# Altium PCB PCB1.PcbDoc
Units mil, origin at the board's own origin, x right, y up, seen from the top; angles counter-clockwise.
Board outline 2283.46 x 3700.79 mil, 2 copper layers (Top Layer, Bottom Layer); 44 components, 39 nets, 211 pads, 27 vias.
Unrouted connection lines stored in the file: 70.
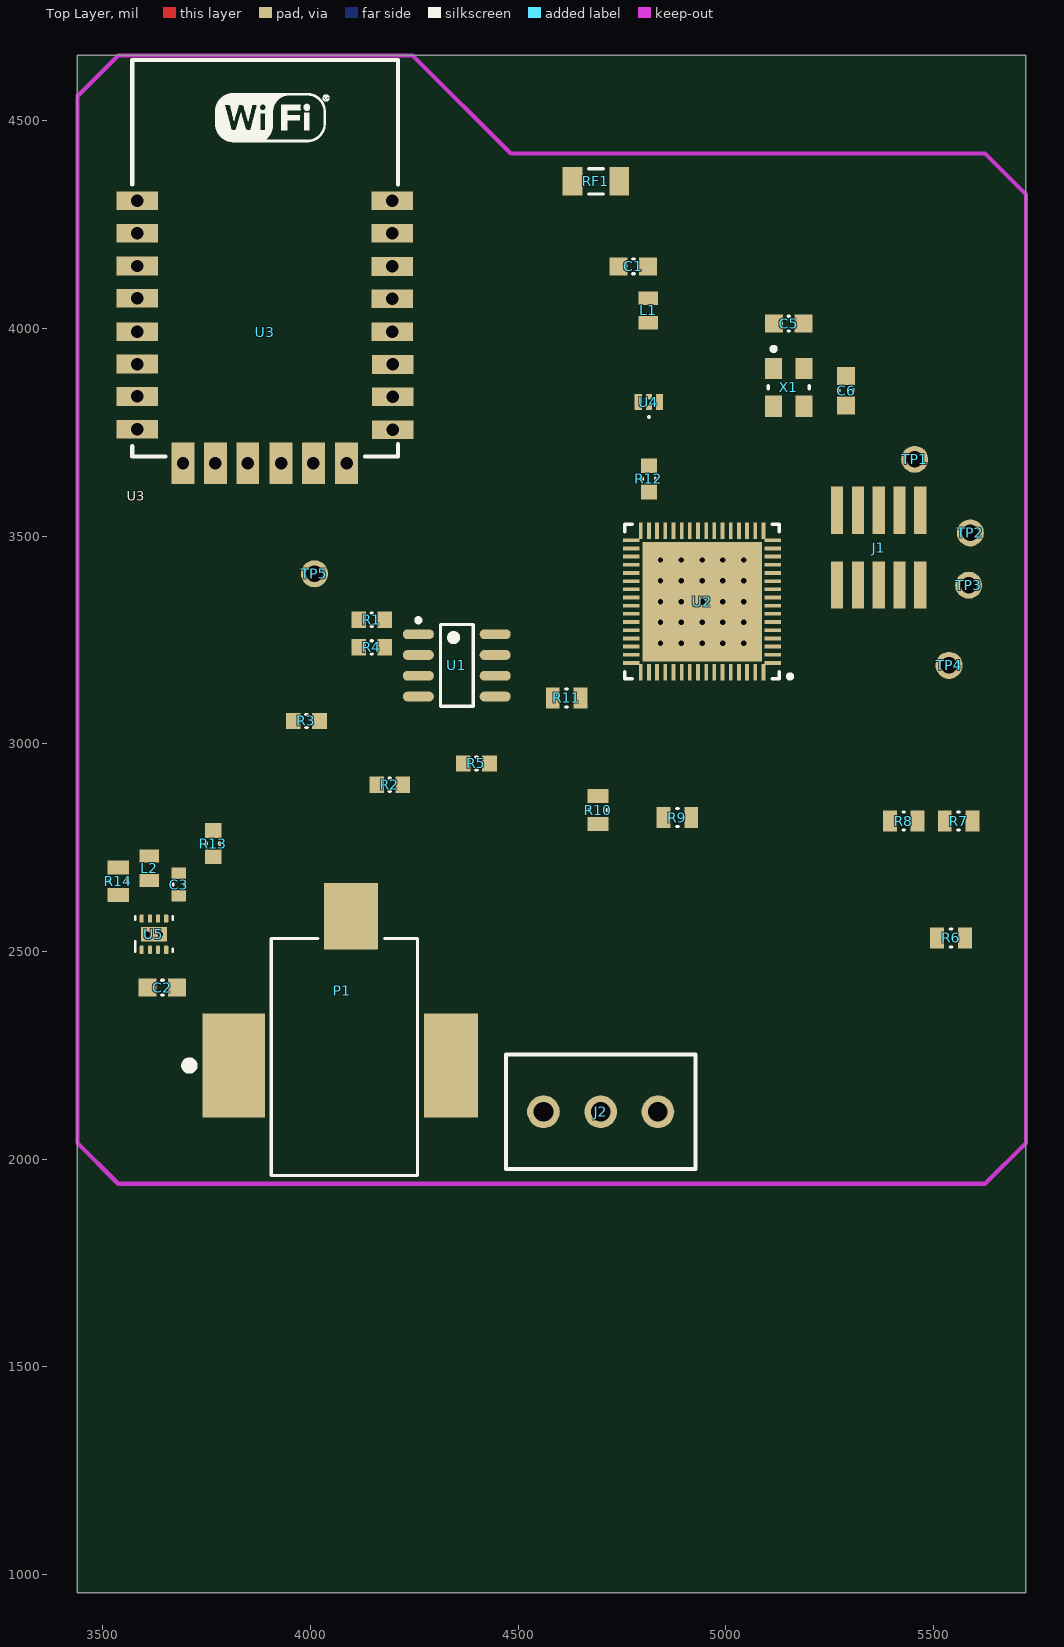
[diagram p0: Top Layer view]
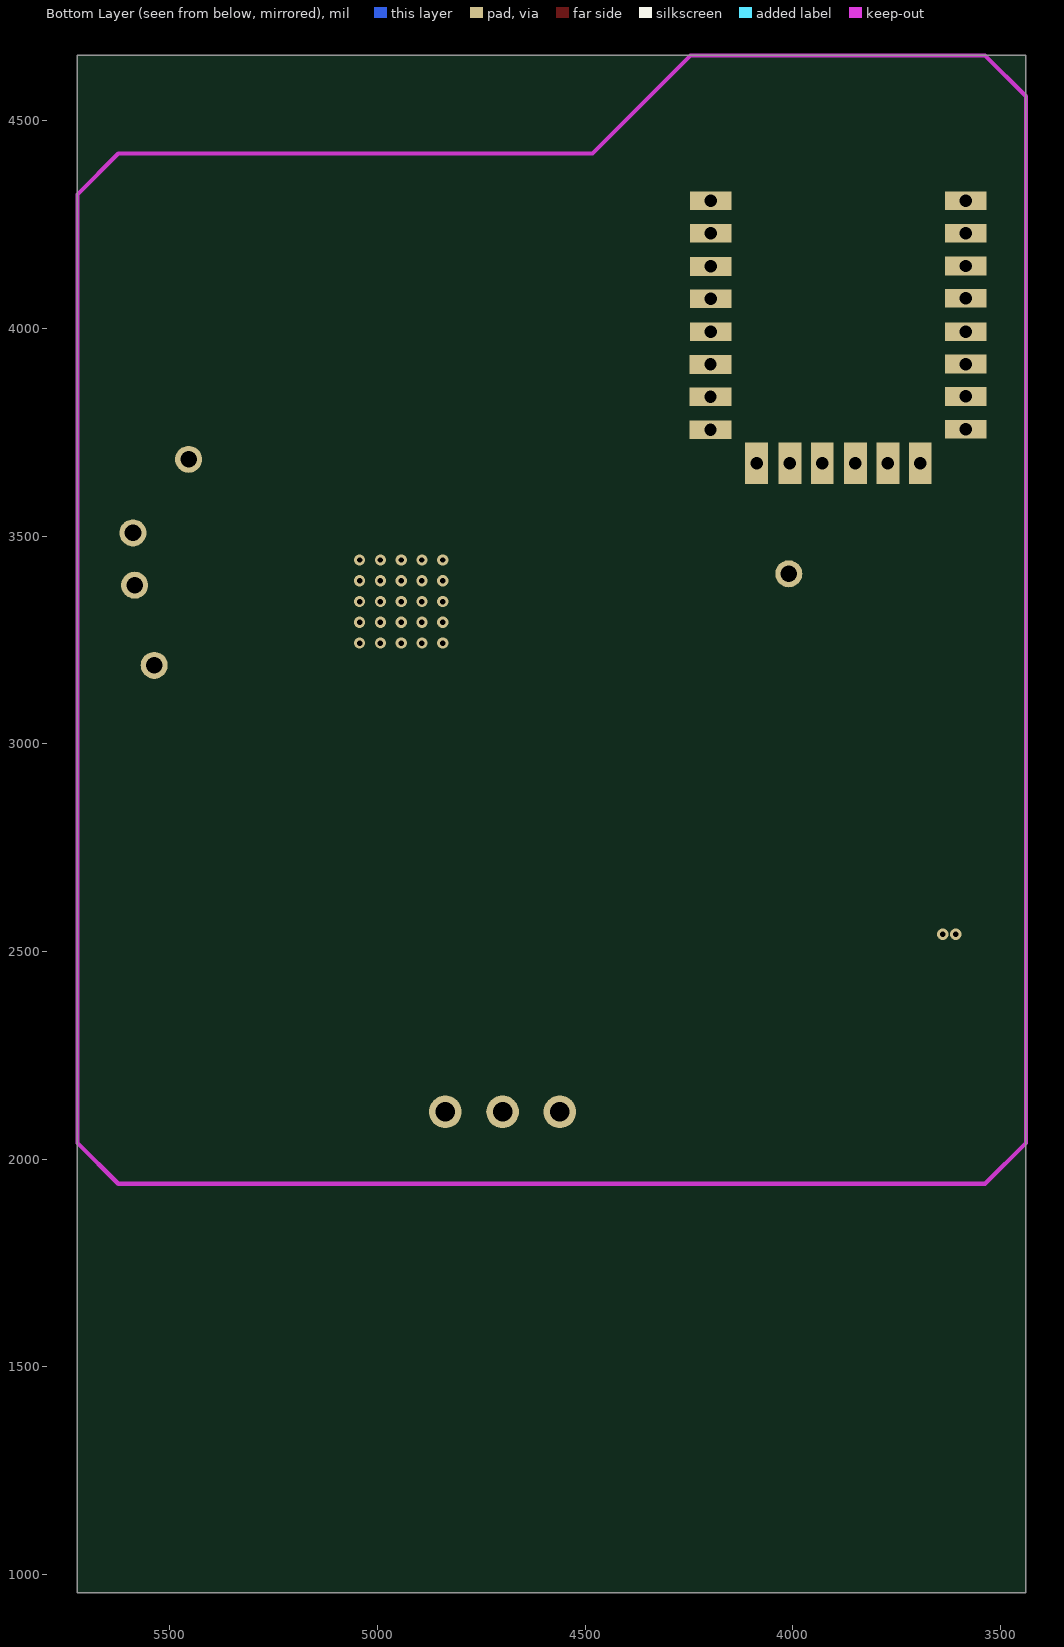
[diagram p1: Bottom Layer view, seen from below]

## Layer stack, top to bottom
Top Solder: solder mask 0.4, Solder Resist, Dk 3.5
Top Layer: signal copper 1.4
Dielectric 1: dielectric 12.6, FR-4, Dk 4.8
Bottom Layer: signal copper 1.4
Bottom Solder: solder mask 0.4, Solder Resist, Dk 3.5

## Board outline
3439.12,956.69 5722.58,956.69 5722.58,4657.48 3439.12,4657.48 3439.12,996.06

## Design rules (kind name [scope] priority, off if disabled: settings)
Clearance [All] p1: gap=6
HoleSize [All] p1: absolutevalues=TRUE maxlimit=100 minlimit=13 maxpercent=80.000 minpercent=20.000
PolygonConnect [All] p1: connectstyle=Relief reliefconductorwidth=10 reliefentries=4 polygonreliefangle="90 Angle" airgapwidth=10
RoutingTopology [All] p1: topology=Starburst
RoutingVias [All] p1: holewidth=28 width=50 viastyle="Through Hole" minholewidth=13 minwidth=27 maxholewidth=28 maxwidth=50
SolderMaskExpansion [All] p1: expansion=4
Width [All] p1: maxlimit=10 minlimit=6 preferedwidth=6
28 further rules are at their usual default settings.

## Components (designator, comment, footprint, x,y, rotation, side; value= is the part's Value field where it differs from the comment)
C1 "CAP 10uF 10V 0603(1608)" CAPC0603(1608)100_M 4777.7,4149.61 r0 top
C2 "CAP 10uF 10V 0603(1608)" CAPC0603(1608)100_M 3643.84,2413.39 r0 top
C3 "22uF" CAPC0603(1608)100_L 3683.21,2661.42 r90 top
C4 "CAP 10uF 10V 0603(1608)" CAPC0603(1608)100_M 6784.55,3033.31 r0 top
C5 "CAP 10uF 10V 0603(1608)" CAPC0603(1608)100_M 5151.72,4011.81 r180 top
C6 "CAP 10uF 10V 0603(1608)" CAPC0603(1608)100_M 5289.51,3850.39 r270 top
C7 "CAP 10uF 10V 0603(1608)" CAPC0603(1608)100_M 6964.55,3463.31 r0 top
C8 "CAP 10uF 10V 0603(1608)" CAPC0603(1608)100_M 7334.55,3443.31 r0 top
C9 "CAP 10uF 10V 0603(1608)" CAPC0603(1608)100_M 6785.38,3259.64 r180 top
CN1 ".01uF" "CAP. ARRAY 0612" 106602.11,87259.84 r0 top
CN2 ".01uF" "CAP. ARRAY 0612" 105041.48,87484.25 r0 top
CN3 ".01uF" "CAP. ARRAY 0612" 106502.11,86385.83 r0 top
J1 "JTAG HEADER" FTSH-105-01-L-DV-K 5368.25,3472.44 r180 top
J2 "Screw Term" "SCREW TERM 3 PIN 3.5mm" 4561.17,2114.17 r0 top
L1 "MLZ2012N100LT" TDK-IND0805-125_V 4813.13,4043.31 r90 top
L2 "MLZ2012N100LT" TDK-IND0805-125_V 3612.35,2700.79 r90 top
NT1 "NET TIE 0603" NetTie0603 6413.69,2681.42 r90 top net-tie
P1 "RASM722X" SWIT-RASM722X_V 4076.91,2405.51 r0 top
R1 "DNP" RESC0603(1608)_N 4147.78,3299.21 r0 top
R2 "DNP" RESC0603(1608)_N 4191.09,2901.57 r0 top
R3 "DNP" RESC0603(1608)_N 3990.3,3055.12 r0 top
R4 "DNP" RESC0603(1608)_N 4147.78,3232.28 r0 top
R5 "0 Ohm" RESC0603(1608)_N 4399.75,2952.76 r0 top
R6 "2.7K" RESC0805(2012)_L 5542.5,2532.68 r0 top
R7 "100K" RESC0805(2012)_L 5560.81,2814.29 r0 top
R8 "100K" RESC0805(2012)_L 5428.61,2814.29 r0 top
R9 "100K" RESC0805(2012)_L 4883.45,2822.68 r0 top
R10 "100K" RESC0805(2012)_L 4692.5,2840.79 r90 top
R11 "2.7K" RESC0805(2012)_L 4616.91,3110.55 r180 top
R12 "0 Ohm" RESC0603(1608)_N 4815.1,3637.8 r270 top
R13 "0 Ohm" RESC0603(1608)_N 3765.89,2759.84 r270 top
R14 "100K" RESC0805(2012)_L 3537.54,2669.29 r90 top
RF1 "Chip Antenna" TAYO-AH316M-2_N 4687.15,4354.33 r0 top
TP1 "5001" Keystone_5001 5454.87,3685.04 r0 top
TP2 "5001" Keystone_5001 5588.72,3507.87 r0 top
TP3 "5001" Keystone_5001 5584.79,3381.89 r0 top
TP4 "5001" Keystone_5001 5537.54,3188.98 r0 top
TP5 "5001" Keystone_5001 4009.98,3409.45 r0 top
U1 "LM358MX" M08A_L 4352.5,3188.98 r0 top
U2 "CC3200" TI-RGC64-7300X7300TP_L 4943.06,3342.52 r180 top
U3 "ESP8266 ESP-12E" "ESP8266 ESP-12-E" 4236.42,3661.42 r0 top
U4 "2.4 GHz BPF" TDK-DEA202450BT-1294C1-H_V 4815.1,3822.83 r180 top
U5 "Buck Regulator" DSG0008A_V 3663.53,2511.81 r90 top
X1 "40MHz Crystal" AVX-CX3225GB-4_V 5151.72,3858.27 r270 top

## Footprints (in the part's own frame and the unit in brackets; to place one, negate y for a bottom-side part, rotate by r counter-clockwise, add the part's x,y. Pads: shape width x height; smd on the part's side, far side on the other; paste and mask are expansions set on the pad)
AVX-CX3225GB-4_V [mm] "SMD, 4-Leads, Body 3.2x2.5mm, Height 0.9mm"
  rect 1.3x1.05 smd: 1(-1.15,-0.925) 2(1.15,-0.925) 3(1.15,0.925) 4(-1.15,0.925)
  silkscreen extent -2.47,-1.25 0.1,1.25, body extent -1.6,-1.25 1.6,1.25, height 0.9
"CAP. ARRAY 0612" [mm]
  rect 0.46x0.89 smd: 1(-1.148,0.745) 2(-0.388,0.745) 3(0.372,0.745) 4(1.132,0.745) 5(-1.148,-0.755) 6(-0.388,-0.755) 7(0.372,-0.755) 8(1.132,-0.755)
  silkscreen extent -1.78,-1.01 1.77,0.89, body extent -1.61,-0.81 1.59,0.69, height 1.35
CAPC0603(1608)100_L [mm]
  rect 0.7x0.9 smd: 1(-0.7,0) 2(0.7,0)
  silkscreen extent -0.05,-0.35 0.05,0.35, body extent -0.87,-0.47 0.88,0.48, height 1
CAPC0603(1608)100_M [mm] "Chip Capacitor, Body 1.6x0.8mm, Height 1.0mm, IPC Low Density"
  rect 1.1x1.1 smd: 1(-0.9,0) 2(0.9,0)
  silkscreen extent -0.05,-0.45 0.05,0.45, body extent -0.87,-0.47 0.88,0.48, height 1
DSG0008A_V [mm] "SON, 8-Leads, Body 2x2mm, Pitch 0.5mm, Thermal Pad 1.6x0.9mm, TI Recommended"
  rrect40% 0.5x0.25 smd: 1(-0.188,1.766) 2(-0.188,1.266) 3(-0.188,0.766) 4(-0.188,0.266) 5(1.712,0.266) 6(1.712,0.766) 7(1.712,1.266) 8(1.712,1.766)
  rrect11% 0.9x1.6 smd paste-0.45: 9(0.762,1.016)
  silkscreen extent -0.31,-0.13 1.84,2.17, body extent -0.29,-0.03 1.81,2.07, height 0.8
"ESP8266 ESP-12-E" [mil] "ESP8266 ESP-12-E"
  rect 100x45 hole 30: 1(-653,646) 2(-653,568) 3(-653,489) 4(-653,411) 5(-653,331) 6(-653,253) 7(-653,175) 8(-653,96) 15(-38,95) 16(-38,174) 17(-38,252) 18(-39,331) 19(-39,410) 20(-39,488) 21(-39,568) 22(-39,646)
  rect 55x100 hole 30: 9(-543,14) 10(-465,14) 11(-387,14) 12(-307,14) 13(-229,14) 14(-149,14)
  silkscreen extent -665,30 -25,985, body extent -661,37 -31,981, height 86
FTSH-105-01-L-DV-K [mm] "Samtec SMT 0.05\" pitch header, keyed 2 rows 10 positions"
  rect 0.74x2.9 smd: 1(2.54,2.286) 2(2.54,-2.286) 3(1.27,2.286) 4(1.27,-2.286) 5(0,2.286) 6(0,-2.286) 7(-1.27,2.286) 8(-1.27,-2.286) 9(-2.54,2.286) 10(-2.54,-2.286)
  body extent -3.14,-2.92 3.14,2.92, height 6.12
Keystone_5001 [mil] "TEST POINT PC MINI .040\"D BLACK"
  round 65 hole 40: 1(0,0)
  body extent -50,-50 50,50, height 192
M08A_L [mm] "SOIC, 8-Leads, Body 4.9x3.9mm, Pitch 1.27mm, IPC High Density"
  oval 1.9x0.6 smd: 1(-2.35,1.905) 2(-2.35,0.635) 3(-2.35,-0.635) 4(-2.35,-1.905) 5(2.35,-1.905) 6(2.35,-0.635) 7(2.35,0.635) 8(2.35,1.905)
  silkscreen extent -2.47,-2.5 1,2.88, body extent -2,-2.5 2,2.5, height 1.75
NetTie0603 [mm] "Net Tie in 0603 land patter"
  rect 1x0.864 smd: 1(-0.95,0) 2(0.95,0)
  Top Layer region: -0.5,-0.3 0.5,-0.3 0.5,0.3 -0.5,0.3
  silkscreen extent -0.1,-0.33 0.1,0.33
RESC0603(1608)_N [mm] "Chip Resistor, Body 1.6x0.8mm, IPC Medium Density"
  rect 0.9x1 smd: 1(-0.8,0) 2(0.8,0)
  silkscreen extent -0.05,-0.4 0.05,0.4, body extent -0.85,-0.47 0.85,0.47, height 0.6
RESC0805(2012)_L [mm] "Chip Resistor, Body 2.0x1.3mm, IPC High Density"
  rect 0.85x1.3 smd: 1(-0.85,0) 2(0.85,0)
  silkscreen extent -0.05,-0.55 0.05,0.55, body extent -1.1,-0.67 1.1,0.68, height 0.7
"SCREW TERM 3 PIN 3.5mm" [mm] "3 pin 3.5mm screw header"
  round 2 hole 1.2: 1(0,0) 2(3.5,0) 3(7,0)
  silkscreen extent -2.3,-3.5 9.3,3.5, body extent -2.3,-4 9.3,3.5, height 8.4
SWIT-RASM722X_V [mm] "SMD, 3-Leads, Body 14.5x9mm"
  rect 3.81x6.35 smd: 1(-6.645,-4.57)
  rect 3.3x4.06 smd: 2(0.545,4.57)
  rect 3.3x6.35 smd: 3(6.645,-4.57)
  silkscreen extent -9.6,-11.3 4.6,3.2, body extent -7.5,-11.23 7.5,5.84, height 11.1
TAYO-AH316M-2_N [mm] "Chip, 2-Leads, Body 3.35x1.75mm, IPC Medium Density"
  rect 1.2x1.75 smd: 1(-1.425,0) 2(1.425,0)
  silkscreen extent -0.45,-0.77 0.45,0.77, body extent -1.68,-0.87 1.67,0.87, height 0.6
TDK-DEA202450BT-1294C1-H_V [mm] "SMD, 4-Leads, Body 2x1.25mm"
  rect 0.35x0.35 smd: 1(0,0.325) 3(0,-0.325)
  rect 0.45x1 smd: 2(0.65,0) 4(-0.65,0)
  silkscreen extent -0.05,0.86 0.05,0.96, body extent -1,-0.63 1,0.63, height 0.8
TDK-IND0805-125_V [mm] "Chip Inductor, 2-Leads, Body 2.0x1.2mm, Height 1.25mm"
  rect 0.8x1.2 smd: 1(-0.75,0) 2(0.75,0)
  body extent -1.1,-0.7 1.1,0.7, height 1.25
TI-RGC64-7300X7300TP_L [mm] "QFN, 64-Leads, Body 9.15x9.15mm, Pitch 0.50mm, Thermal Pad 7.30x7.30mm, IPC High Density"
  rect 1.016x0.229 smd: 1(-4.325,3.75) 2(-4.325,3.25) 3(-4.325,2.75) 4(-4.325,2.25) 5(-4.325,1.75) 6(-4.325,1.25) 7(-4.325,0.75) 8(-4.325,0.25) 9(-4.325,-0.25) 10(-4.325,-0.75) 11(-4.325,-1.25) 12(-4.325,-1.75) 13(-4.325,-2.25) 14(-4.325,-2.75) 15(-4.325,-3.25) 16(-4.325,-3.75) 33(4.325,-3.75) 34(4.325,-3.25) 35(4.325,-2.75) 36(4.325,-2.25) 37(4.325,-1.75) 38(4.325,-1.25) 39(4.325,-0.75) 40(4.325,-0.25) 41(4.325,0.25) 42(4.325,0.75) 43(4.325,1.25) 44(4.325,1.75) 45(4.325,2.25) 46(4.325,2.75) 47(4.325,3.25) 48(4.325,3.75)
  rect 0.229x1.016 smd: 17(-3.75,-4.325) 18(-3.25,-4.325) 19(-2.75,-4.325) 20(-2.25,-4.325) 21(-1.75,-4.325) 22(-1.25,-4.325) 23(-0.75,-4.325) 24(-0.25,-4.325) 25(0.25,-4.325) 26(0.75,-4.325) 27(1.25,-4.325) 28(1.75,-4.325) 29(2.25,-4.325) 30(2.75,-4.325) 31(3.25,-4.325) 32(3.75,-4.325) 49(3.75,4.325) 50(3.25,4.325) 51(2.75,4.325) 52(2.25,4.325) 53(1.75,4.325) 54(1.25,4.325) 55(0.75,4.325) 56(0.25,4.325) 57(-0.25,4.325) 58(-0.75,4.325) 59(-1.25,4.325) 60(-1.75,4.325) 61(-2.25,4.325) 62(-2.75,4.325) 63(-3.25,4.325) 64(-3.75,4.325)
  rect 7.3x7.3 smd: 65(0,0)
  silkscreen extent -5.5,-4.72 4.72,4.72, body extent -4.57,-4.57 4.57,4.57, height 1

## Part data
C1 C2 C4 C5 C6 C7 C8 C9: library part CMP-1035-02800-1, "CAP 10uF 10V ±20% 0603 (1608 Metric) Thickness 1mm SMD"
C3: library part CMP-1590-00005-1, "0603 (1608 Metric) Chip Capacitor"
CN1 CN2 CN3: library part "Cap. Array 0612"
J1: library part "JTAG 10 PIN HEADER", "10 pin 0.05\" pitch header for JTAG"
J2: library part "SCREW TERM 3.5mm 3pos"
L1 L2: library part CMP-0266-00001-1, "Multilayer Inductor, 10 uH, ±20%, 300 mOhm, 50MHz, 0805(2012)"
NT1: library part "NET TIE"
P1: library part CMP-1772-00002-1, "Power Jack, 5 A, 250 V, 3-Pin SMD, RoHS, Bulk"
R1 R2 R3 R4 R5 R12 R13: library part CMP-1012-00001-1, "Jumper 0603 (1608 Metric)"
R6 R7 R8 R9 R10 R11 R14: library part CMP-1013-00122-1, "100K 0.125W 5% 0805 (2012 Metric)  SMD"
RF1: library part CMP-1660-00004-1, "Chip Antenna, 2.4 to 2.5 GHz, -40 to 85 degC, 2-Pin SMD, Pb-Free, Tape and Reel"
TP1 TP2 TP3 TP4 TP5: library part "TEST POINT", "TEST POINT PC MINI .040\"D BLACK"
U1: library part CMP-0055-00630-1, "Low Power Dual Operational Amplifier, 8-pin Narrow SOIC"
U2: library part CMP-1530-00002-1, "SimpleLink Wi-Fi and Internet-of-Things Solution, a Single-Chip Wireless MCU, 2.1 to 3.6 V, -40 to 85 degC, 64-Pin PQFN (RGC64), Green (RoHS & no Sb/Br), Tray"
U3: library part "ESP8266 ESP-12-E", "ESP8266 ESP-12-E"
U4: library part CMP-1663-00013-1, "2.4 GHz Filter"
U5: library part CMP-0323-00337-3, "Buck Step Down Regulator with 3 to 17 V Input and 3.3 V Output, -40 to 85 degC, 8-Pin WSON (DSG), Green (RoHS & no Sb/Br)"
X1: library part CMP-0614-00001-1, "Crystal Unit, 8 pF, 25000 kHz, -10 to 70 degC, 4-Pin 3.2 x 2.5 x 0.8 mm SMD, RoHS, Tape and Reel"

## Via types
v1: diameter 27, hole 13, Top Layer to Bottom Layer, 27 vias

## Nets (pads, with @x,y where several pads share a name; then routed paths per layer and width w, separated by ;. In a path a pad name is that pad's centre, name@x,y a point inside that pad or via, vN(x,y) a via of type N, cw(c..) or ccw(c..) an arc to the next point about the centre after c; other vN are vias at no path point)
3V3: C3.2 J1.1 L2.2 R10.2 R13.2 R14.2 U1.5 U1.8 U3.3 U3.8 U5.6
12VDC: C2.2 J2.1 P1.1 U5.2 U5.3
ADC_CH0: R1.2 R5.1 TP5.1 U1.1 U2.57
GND: C2.1 C3.1 C4.2 C5.1 C6.1 C7.1 C8.1 C9.1 CN1.5 CN1.6 CN1.7 CN1.8 CN2.5 CN2.6 CN2.7 CN2.8 CN3.5 CN3.6 CN3.7 CN3.8 J1.3 J1.5 J2.3 NT1.1 P1.2 P1.3 R3.1 R4.1 R6.1 R7.1 R8.1 R9.1 R11.1 U1.4 U1.6 U2.65 U5.1 U5.4 U5.5 U5.9 X1.2 X1.4
  other v1: 3607.78,2541.81 3639.28,2541.81 4843.06,3242.52 4893.06,3242.52 4943.06,3242.52 4993.06,3242.52 5043.06,3242.52 4843.06,3292.52 4893.06,3292.52 4943.06,3292.52 4993.06,3292.52 5043.06,3292.52 4843.06,3342.52 4893.06,3342.52 4943.06,3342.52 4993.06,3342.52 5043.06,3342.52 4843.06,3392.52 4893.06,3392.52 4943.06,3392.52 4993.06,3392.52 5043.06,3392.52 4843.06,3442.52 4893.06,3442.52 4943.06,3442.52 4993.06,3442.52 5043.06,3442.52
NetC4_1: C4.1 CN3.3 U2.42
NetC5_2: C5.2 U2.23 X1.1
NetC6_2: C6.2 U2.22 X1.3
NetC7_2: C7.2 C8.2 C9.2 CN1.1 CN2.2 R13.1 U2.10 U2.37 U2.39 U2.44 U2.54
NetCN1_2: CN1.2 U2.48
NetCN1_3: CN1.3 U2.49
NetCN1_4: CN1.4 U2.56
NetCN2_1: CN2.1 U2.25
NetCN2_3: CN2.3 U2.9
NetCN2_4: CN2.4 U2.24
NetCN3_1: CN3.1 U2.47
NetCN3_2: CN3.2 U2.33
NetCN3_4: CN3.4 U2.36
NetJ1_2: J1.2 TP1.1 U2.20
NetJ1_4: J1.4 R9.2 TP2.1 U2.19
NetJ1_6: J1.6 TP3.1 U2.17
NetJ1_8: J1.8 TP4.1 U2.16
NetL1_1: L1.1 U4.3
NetL2_1: L2.1 U5.7
NetR1_1: R1.1 R4.2 U1.2
NetR2_1: R2.1 R3.2 U1.3
NetR6_2: R6.2 U2.21
NetR7_2: R7.2 U2.34
NetR8_2: R8.2 U2.35
NetR12_1: R12.1 U4.1
NetR12_2: R12.2 U2.31
NetR14_1: R14.1 U5.8
R\E\S\E\T\: J1.10 R10.1 U2.32
RF_GND: C1.1 C1.2 L1.2 NT1.2 RF1.1 RF1.2 U3.15 U4.2 U4.4
UART1_RX: U2.2 U3.22
UART1_TX: U2.1 U3.21
UART_CTS: U2.61 U3.16
UART_RTS: U2.50 U3.7
W\F\I\_R\S\T\: R11.2 U2.6 U3.1
WIND_SENSE: J2.2 R2.2 R5.2
pads on no net: J1.7 J1.9 U1.7 U2.3 U2.4 U2.5 U2.7 U2.8 U2.11 U2.12 U2.13 U2.14 U2.15 U2.18 U2.26 U2.27 U2.28 U2.29 U2.30 U2.38 U2.40 U2.41 U2.43 U2.45 U2.46 U2.51 U2.52 U2.53 U2.55 U2.58 U2.59 U2.60 U2.62 U2.63 U2.64 U3.2 U3.4 U3.5 U3.6 U3.9 U3.10 U3.11 U3.12 U3.13 U3.14 U3.17 U3.18 U3.19 U3.20

## Keep-outs
Keep-Out Layer:
  lines w10: 3439.12,2039.37 3537.54,1940.94 5624.16,1940.94 5722.58,2039.37 5722.58,4322.83 5624.16,4421.26 4482.43,4421.26 4246.2,4657.48 3537.54,4657.48 3439.12,4559.06 3439.12,2039.37

## Text inside footprints (layer, text, board x,y; h text height)
U3: Mechanical 13 "ANTENNA AREA" at 3583.46,4622.01 h10; Mechanical 13 "CUTOUT POLYGON" at 3583.46,4602.01 h10